# EAGLE board m-power-v0 (EAGLE 5.07)
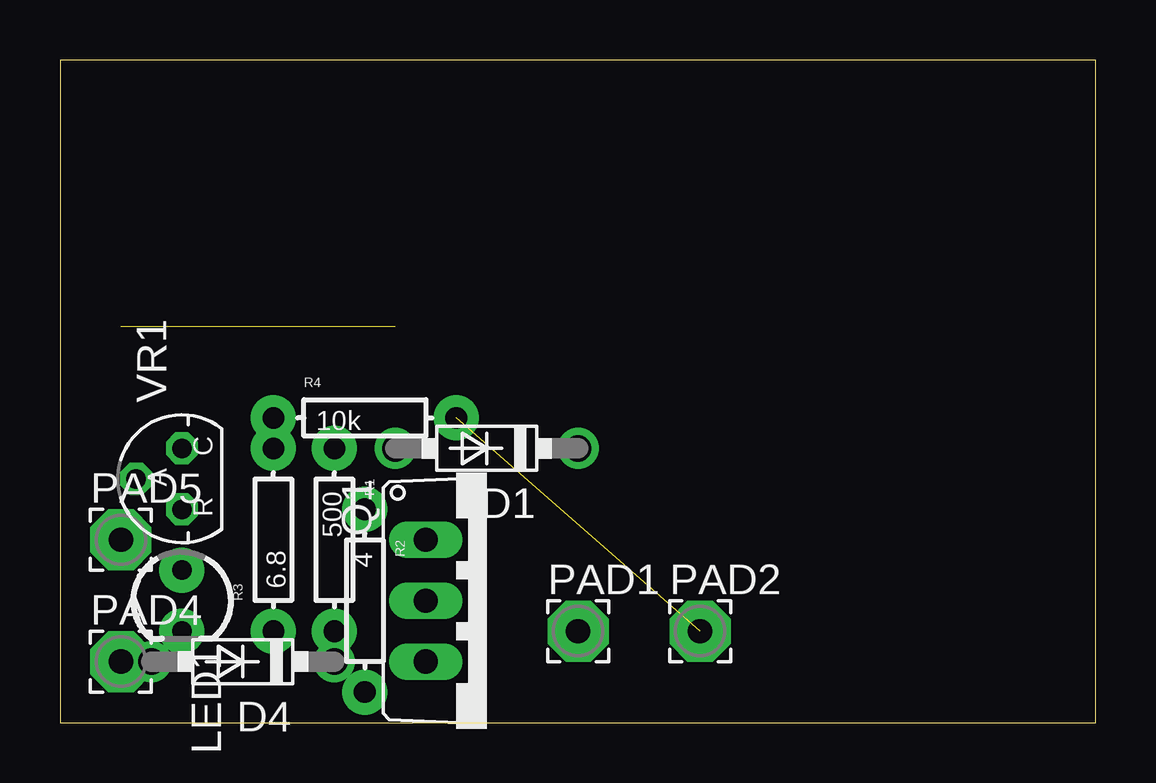
[diagram p0: board, top side]
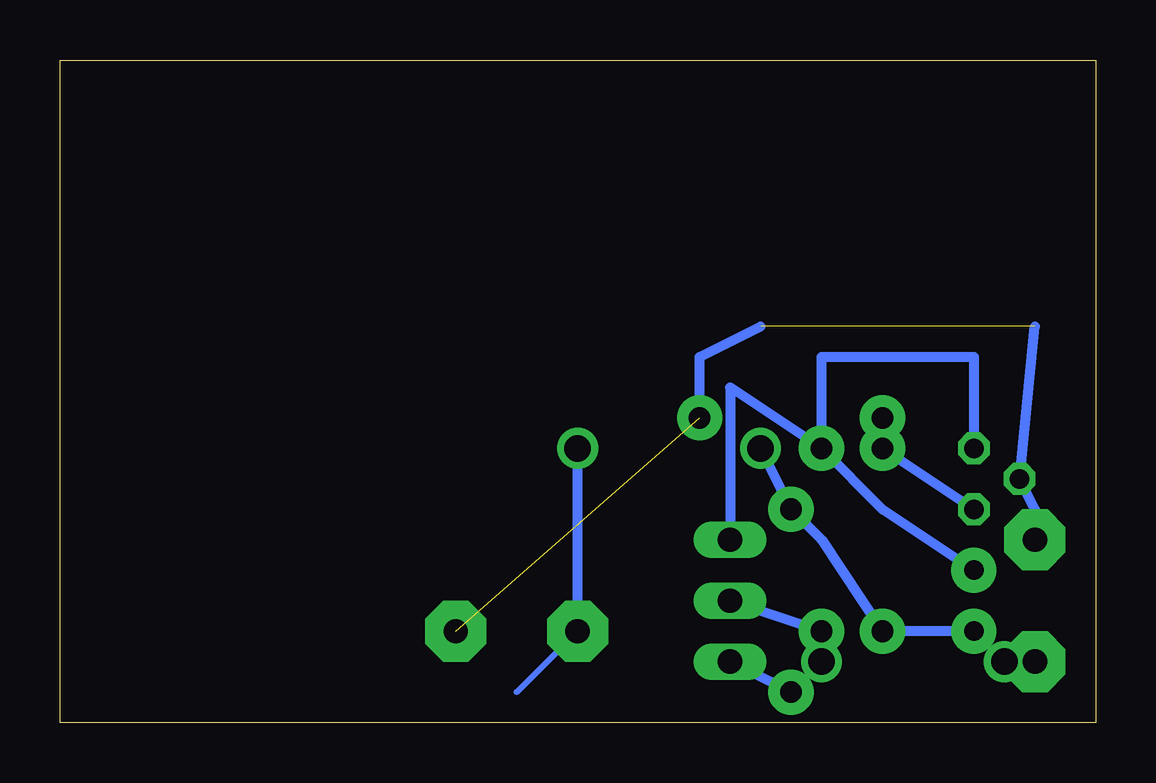
[diagram p1: board, bottom side, seen from below]

Size 43.16 x 27.61 mm. Coordinates in mm from the lower left corner, seen from the top.
Outline: 0,0 43.16,0 43.16,27.61 0,27.61 0,0
Copper layers (1*16): Top 0.035mm / dielectric 1.5mm / Bottom 0.035mm
Design rules "default": minimum track width 10mil, minimum drill 24mil, track to track 8mil, track to pad 8mil, pad to pad 8mil, via to via 8mil, smd to smd 8mil, copper to edge 40mil, drill to drill 8mil, minimum pad ring 10mil, minimum via ring 8mil, stop-mask expansion 4mil, vias tented up to drill 0mil, thermal gap 10mil

## Footprints (pad centres in the part's own frame; a part is rotated, then mirrored left to right if it is on the bottom)
DO41-7.6 = drill 1.1 pad 1.7 round: A 3.81,0; C -3.81,0
LED3MM = drill 0.813 pad 1.88 round: A -1.27,0; K 1.27,0
2,54/1,0 = drill 1.016 pad 2.54 octagon: 1 0,0
TO220AV = drill 1.016 long: B -2.54,-2.54; C 0,-2.54; E 2.54,-2.54
AXIAL-0.3 = drill 0.9 pad 1.88 round: P$1 -3.81,0; P$2 3.81,0
TO92-CLP = drill 0.813 octagon: A 0,1.905; C 1.27,0; R -1.27,0

## Placement (x,y rotation side)
D1  1N5819-B  [DO41-7.6]  17.78,11.43 180 top
D4  1N5819-B  [DO41-7.6]  7.62,2.54 180 top
LED1  [LED3MM]  5.08,5.08 270 top
PAD1  BAT+  [2,54/1,0]  21.59,3.81 0 top
PAD2  BAT-  [2,54/1,0]  26.67,3.81 0 top
PAD4  CHR+  [2,54/1,0]  2.54,2.54 0 top
PAD5  CHR-  [2,54/1,0]  2.54,7.62 0 top
Q1  TIP41C  [TO220AV]  17.78,5.08 270 top
R1  500  [AXIAL-0.3]  11.43,7.62 270 top
R2  4  [AXIAL-0.3]  12.7,5.08 270 top
R3  6.8  [AXIAL-0.3]  8.89,7.62 90 top
R4  10k  [AXIAL-0.3]  12.7,12.7 0 top
VR1  TL431  [TO92-CLP]  5.08,10.16 90 top

## Library data of the parts
D1 D4 = diode
LED1 R1-R4 = digital-toy
PAD1 PAD2 PAD4 PAD5 = wirepad
Q1 = transistor-power
VR1 = v-reg

## Nets
GND: PAD2.1 PAD5.1 R4.P$2 VR1.A
N$1: Q1.E R2.P$2
N$3: LED1.A Q1.B R1.P$1 VR1.C
N$4: D1.A LED1.K R2.P$1 R3.P$1
N$5: R3.P$2 R4.P$1 VR1.R
N$7: D1.C PAD1.1
N$13: D4.A PAD4.1
VCC: D4.C Q1.C R1.P$2

## Tracks (layer width: path | path; a pad name or v marks a point on that pad's centre or on a via)
GND  (2 unrouted)
  Bottom 0.406: PAD5.1 2.54,8.89 VR1.A 2.54,16.51 | 13.97,16.51 16.51,15.24 R4.P$2
N$1
  Bottom 0.406: R2.P$2 Q1.E
N$3
  Bottom 0.406: Q1.B 15.24,13.97 R1.P$1 | LED1.A 8.89,8.89 R1.P$1 | VR1.C 5.08,15.24 11.43,15.24 R1.P$1
N$4
  Bottom 0.406: LED1.K R3.P$1 11.43,7.62 R2.P$1 D1.A
N$5
  Bottom 0.406: VR1.R R3.P$2 R4.P$1
N$7
  Bottom 0.254: PAD1.1 24.13,1.27
  Bottom 0.406: PAD1.1 D1.C
N$13
  Bottom 0.406: PAD4.1 D4.A
VCC
  Bottom 0.406: D4.C R1.P$2 Q1.C